# Altium PCB SM_ME0005V2.6_20161210.PcbDoc (part 1 of 3)
Units mil, origin at the board's own origin, x right, y up, seen from the top; angles counter-clockwise.
Board outline 2285 x 3470 mil, 2 copper layers (Top Layer, Bottom Layer); 87 components, 70 nets, 269 pads, 297 vias.
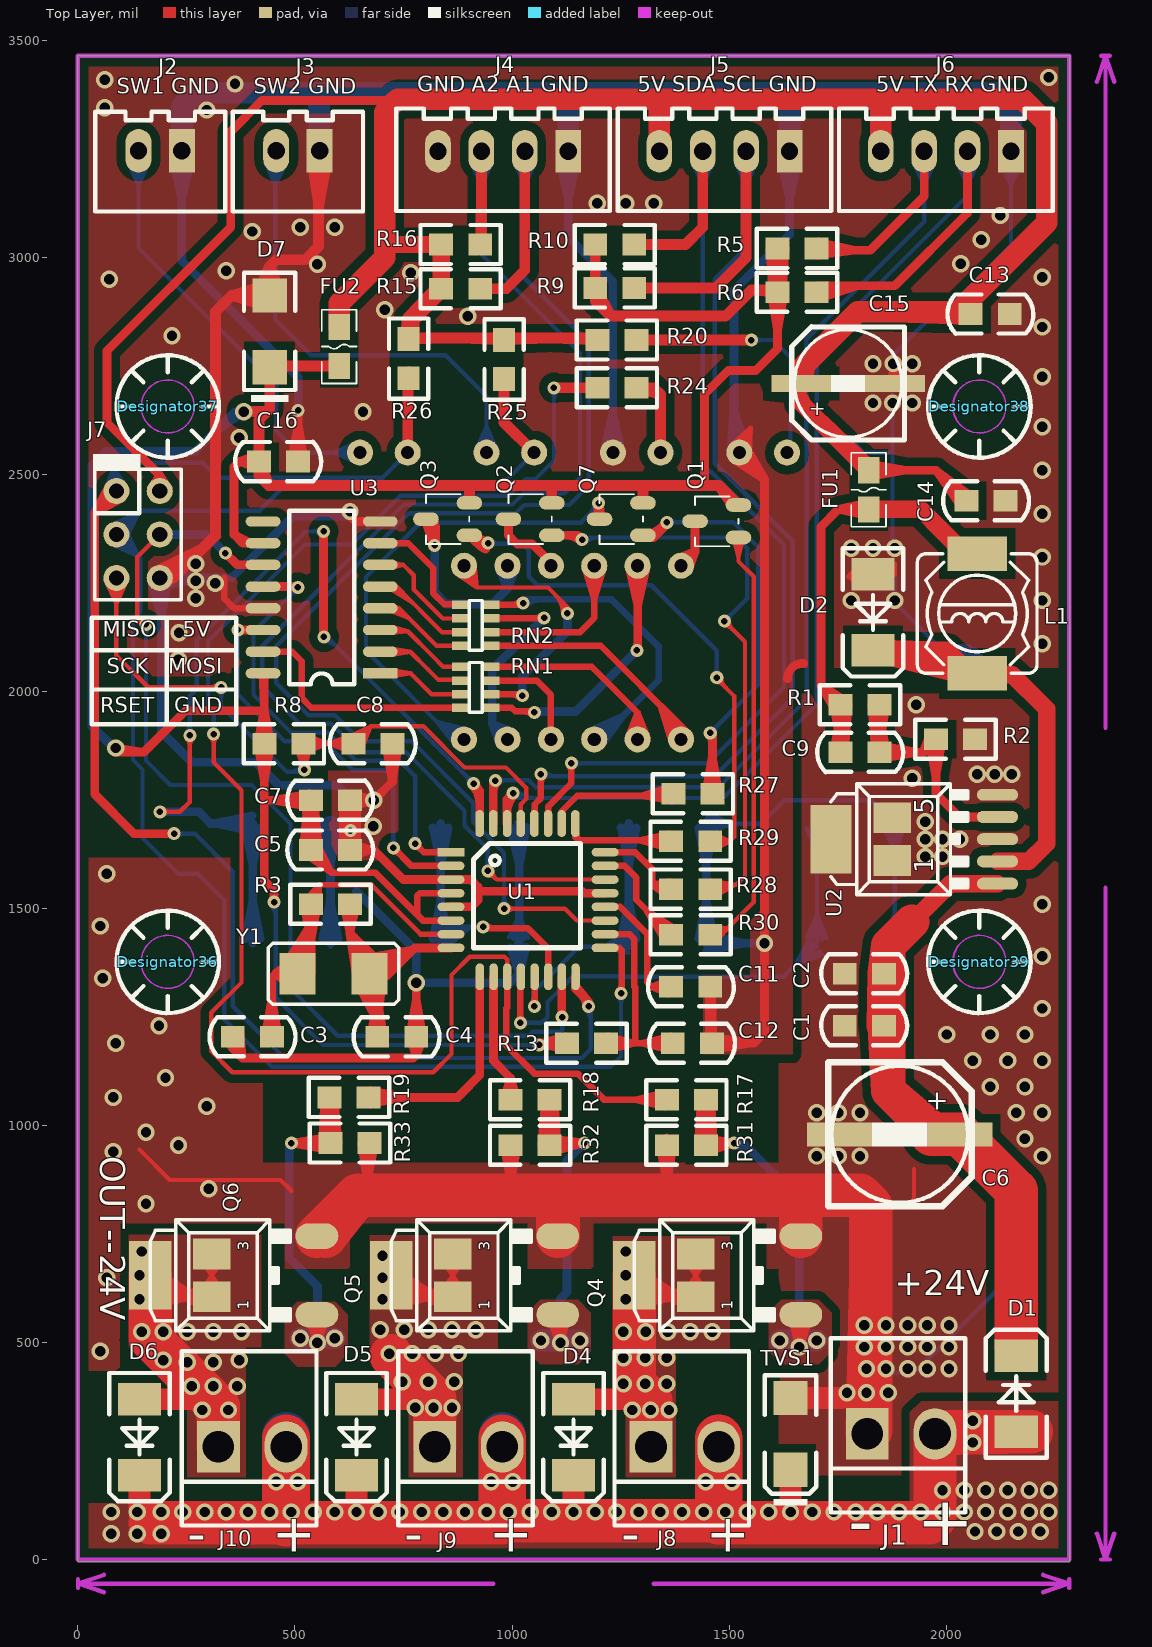
[diagram p0: Top Layer view]
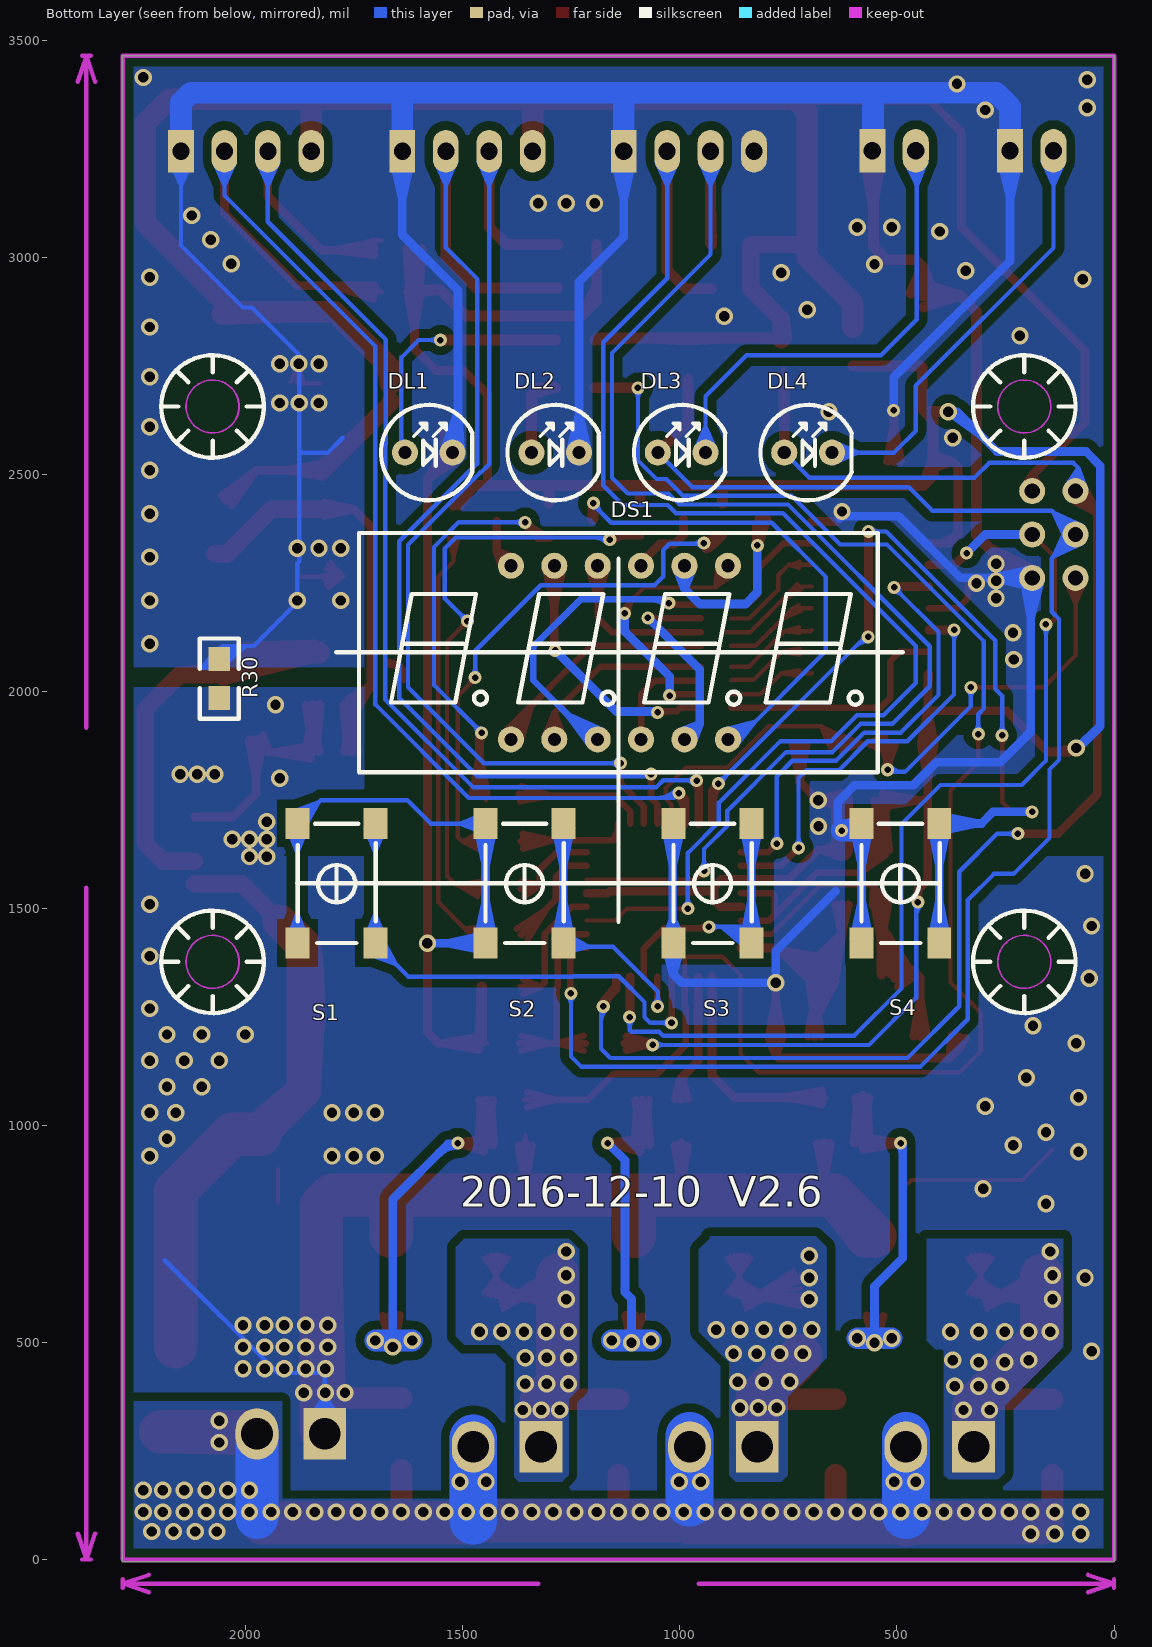
[diagram p1: Bottom Layer view, seen from below]
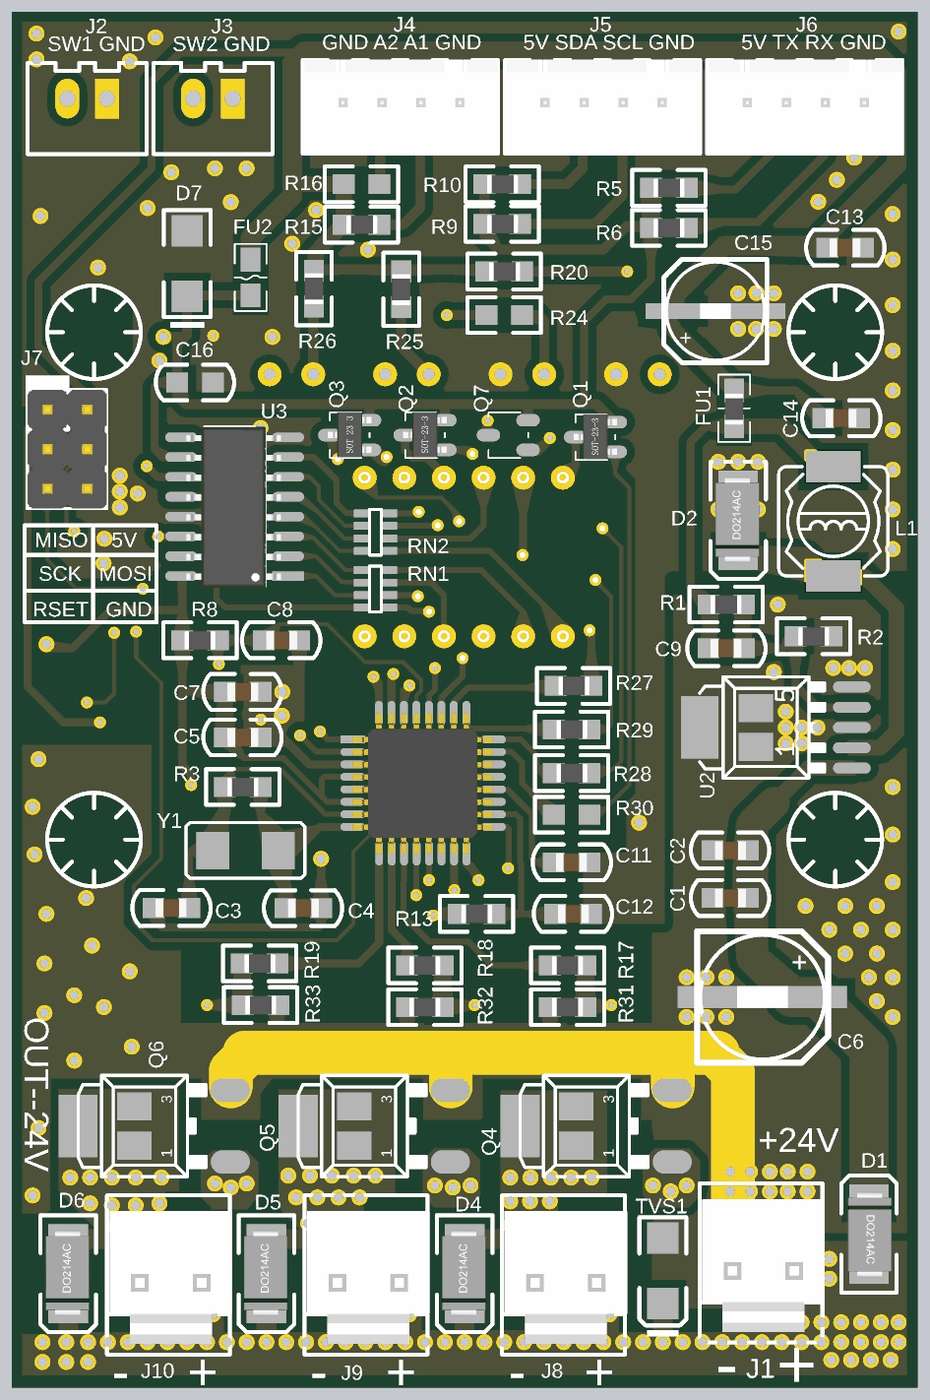
[diagram p4: 3D render of the assembled board from above, using the file's embedded part models]

## Layer stack, top to bottom
Top Layer: signal copper 1.4
Dielectric: core 12.6, FR-4, Dk 4.8
Bottom Layer: signal copper 1.4

## Board outline
-0.51,3464.57 -0.51,-5.43 2284.49,-5.43 2284.49,3464.57

## Design rules (kind name [scope] priority, off if disabled: settings)
AssemblyTestPointUsage [All] p1 off:
AssemblyTestpoint [All] p1 off: testpointundercomponent=TRUE minsize=40 maxsize=100 preferedsize=60 minholesize=0 maxholesize=40 preferedholesize=32 testpointgrid=1 usegrid=TRUE gridtolerance=0.01 allowsidetop=TRUE allowsidebottom=TRUE
Clearance [All] p1: gap=10
ComponentClearance [All] p1 off: gap=10 collisioncheckmode=3 verticalgap=10 showdistances=FALSE
FabricationTestPointUsage TestPointUsage [All] p1 off: valid=0 allowmultiple=FALSE
FabricationTestpoint Testpoint [All] p1 off: side=3 testpointundercomponent=TRUE minsize=40 maxsize=100 preferedsize=60 minholesize=0 maxholesize=40 preferedholesize=32 testpointgrid=1 allowsidetop=TRUE allowsidebottom=TRUE usegrid=TRUE gridtolerance=0.01
Height [All] p1 off: minheight=0 maxheight=1000 prefheight=500
HoleSize [All] p1 off: absolutevalues=TRUE maxlimit=100 minlimit=1 maxpercent=80.000 minpercent=20.000
HoleToHoleClearance [All] p1 off: gap=10 allowstackedmicrovias=TRUE
LayerPairs [All] p1 off: enforce=TRUE
MinimumSolderMaskSliver [All] p1 off: minsoldermaskwidth=10
NetAntennae [All] p1 off: netantennaetolerance=0
PolygonConnect [All] p1: connectstyle=Direct reliefconductorwidth=30 reliefentries=4 polygonreliefangle="45 Angle"
RoutingVias [All] p1: holewidth=15 width=30 viastyle="Through Hole" minholewidth=10 minwidth=20 maxholewidth=30 maxwidth=50
SilkToSilkClearance [All] p1 off: silktosilkclearance=10
SilkscreenOverComponentPads [IsPad] p1 off: minsilkscreentomaskgap=10
SolderMaskExpansion [isvia] p1: expansion=-100
Width [All] p1: maxlimit=300 minlimit=10 preferedwidth=20 minimp=50.000000 maximp=50.000000 favimp=50.000000
15 further rules are at their usual default settings.

## Components (designator, comment, footprint, x,y, rotation, side; value= is the part's Value field where it differs from the comment)
C1 "100pF" 0805C 1811.73,1229.57 r180 top
C2 "100pF" 0805C 1811.73,1349.57 r180 top
C3 "22pF" 0805C 401.73,1204.57 r0 top
C4 "22pF" 0805C 734.49,1204.08 r180 top
C5 "0.1uF" 0805C 581.73,1634.57 r180 top
C6 "100UF/63V_E" SMD-EC-F8 2031.73,979.57 r180 top
C7 "0.1uF" 0805C 581.73,1749.57 r180 top
C8 "100nF" 0805C 679.49,1879.57 r180 top
C9 "33nF" 0805C 1801.73,1859.57 r0 top
C11 "100nF" 0805C 1411.73,1319.57 r0 top
C12 "100nF" 0805C 1415.4,1189.57 r180 top
C13 "0.1UF" 0805C 2101.73,2869.57 r0 top
C14 "100pF" 0805C 2091.73,2439.57 r0 top
C15 "100uF/16V" SMD-EC-F6.3 1666.73,2709.57 r0 top
C16 "10uF" 0805c 461.73,2529.57 r180 top
D1 "1N4004" D7227 2161.73,294.57 r90 top
D2 "SS34" D7227 1831.73,2269.57 r270 top
D4 "1N4004" D7227 1141.73,369.57 r270 top
D5 "1N4004" D7227 641.73,369.57 r270 top
D6 "1N4004" D7227 141.73,369.57 r270 top
D7 "5.6V" LC-SMA(DO-214AC)_S4 441.73,2829.57 r90 top
Designator36 "Comment" M3.1 206.69,1376.97 r0 top locked
Designator37 "Comment" M3.1 206.69,2656.5 r0 top locked
Designator38 "Comment" M3.1 2076.77,2656.5 r0 top locked
Designator39 "Comment" M3.1 2076.77,1376.97 r0 top locked
DL1 "红" LED-3 1578.74,2550.2 r180 bottom
DL2 "绿" LED-3 1287.4,2550.2 r180 bottom
DL3 "黄" LED-3 996.06,2550.2 r180 bottom
DL4 "黄" LED-3 704.72,2550.2 r180 bottom
DS1 "SR410561K" SR410361 1139.49,2089.57 r180 bottom
FU1 "500mA/6V" F0805 1821.73,2419.57 r90 top
FU2 "100mA/6V" F0805 601.73,2839.57 r270 top
J1 "SIP2-2.54" CH3.96-2P 1974.49,289.57 r0 top
J2 "SIP2-2.54" SIP-2L 189.49,3245.57 r180 top
J3 "SIP2-2.54" SIP-2L 506.73,3245.57 r180 top
J4 "A_INPUT" SIP-4L 1129.49,3244.57 r180 top
J5 "IIC" SIP-4L 1639.49,3244.57 r180 top
J6 "USRT" SIP-4L 2149.49,3244.57 r180 top
J7 "ISP下载口" DIP6-2.54 239.49,2514.57 r270 top
J8 "OUT-A" CH3.96-2P 1476.15,259.57 r0 top
J9 "OUT-B" CH3.96-2P 977.82,259.57 r0 top
J10 "OUT-C" CH3.96-2P 479.49,259.57 r0 top
L1 "100uH/1A" L-CD74 2071.73,2179.57 r270 top
Q1 "S8550" SOT-23_B 1521.73,2354.57 r90 top
Q2 "S8550" SOT-23_B 1091.73,2359.57 r90 top
Q3 "S8550" SOT-23_B 901.73,2359.57 r90 top
Q4 "NCE4060K" TO-252-3S 1419.49,654.57 r90 top
Q5 "NCE4060K" TO-252-3S 859.49,654.57 r90 top
Q6 "NCE4060K" TO-252-3S 304.49,654.57 r90 top
Q7 "S8550" SOT-23_B 1301.73,2359.57 r90 top
R1 "10K" 0805R 1801.73,1969.57 r0 top
R2 "3.3K" 0805R 2021.73,1889.57 r180 top
R3 "1MR" 0805R 581.73,1509.57 r180 top
R5 "2K" 0805R 1656.73,3020.57 r180 top
R6 "2K" 0805R 1656.73,2919.57 r180 top
R8 "1K" 0805R 474.49,1879.57 r0 top
R9 "2K" 0805R 1236.73,2929.57 r180 top
R10 "2K" 0805R 1236.73,3029.57 r180 top
R13 "10R" 0805R 1171.73,1189.57 r180 top
R15 "10K" 0805R 881.73,2927.57 r180 top
R16 "10K" 0805R 881.73,3029.57 r180 top
R17 "22R" 0805R 1401.73,1059.57 r0 top
R18 "22R" 0805R 1041.73,1059.57 r0 top
R19 "22R" 0805R 624.49,1064.57 r180 top
R20 "2K" 0805R 1241.73,2809.57 r180 top
R24 "2K" 0805R 1241.73,2699.57 r180 top
R25 "2K" 0805R 981.73,2764.57 r90 top
R26 "2K" 0805R 761.73,2766.57 r90 top
R27 "1K" 0805R 1416.73,1764.57 r180 top
R28 "1K" 0805R 1411.73,1654.57 r180 top
R29 "1K" 0805R 1411.73,1544.57 r180 top
R30 "1K" 0805R 1411.73,1439.57 r180 top
R30 "0R" 0805R 2061.73,2029.57 r90 bottom
R31 "470K" 0805R 1401.73,954.57 r0 top
R32 "470k" 0805R 1041.73,954.57 r0 top
R33 "470k" 0805R 626.73,959.57 r180 top
RN1 "8P4R 0603" 8P4R_0603 881.73,2056.57 r0 top
RN2 "8P4R 0603" 8P4R_0603 881.73,2199.57 r0 top
S1 "SW-PB" BUTTON_SMT_6*6 1791.34,1558.07 r90 bottom
S2 "SW-PB" BUTTON_SMT_6*6 1358.27,1558.07 r90 bottom
S3 "SW-PB" BUTTON_SMT_6*6 925.2,1558.07 r90 bottom
S4 "SW-PB" BUTTON_SMT_6*6 492.13,1558.07 r90 bottom
TVS1 "SMBJ30CA" LC-SMA(DO-214AC)_S5 1641.73,289.57 r90 top
U1 "ATMEGA328PA" TQFP32 819.49,1729.57 r0 top
U2 "XL7015" TO-252-5L 1921.73,1659.57 r90 top
U3 "SN74HC595D" SO-16N 739.49,2014.57 r180 top
Y1 "16MHz" SMT5032 588.73,1349.57 r180 top

## Footprints (in the part's own frame and the unit in brackets; to place one, negate y for a bottom-side part, rotate by r counter-clockwise, add the part's x,y. Pads: shape width x height; smd on the part's side, far side on the other; paste and mask are expansions set on the pad)
8P4R_0603 [mm]
  rect 1.016x0.5 smd: 1(0,0) 2(1.778,0) 3(0,-0.8) 4(1.778,-0.8) 5(0,-1.6) 6(1.778,-1.6) 7(0,-2.4) 8(1.778,-2.4)
  silkscreen extent 0.51,-2.67 1.27,0.25
0805C [mil]
  rect 55x50 smd: 1(-45,0) 2(45,0)
  silkscreen extent -99,-45 99,45, body extent -40,-24 39,24, height 37
0805c [mil]
  rect 55x50 smd: 1(-45,0) 2(45,0)
  silkscreen extent -99,-45 99,45
0805R [mil]
  rect 55x50 smd: 1(-45,0) 2(45,0)
  silkscreen extent -92,-45 92,45, body extent -40,-24 39,24, height 20
BUTTON_SMT_6*6 [mm]
  rect 1.8x1.4 smd paste+0: 1(-3.5,2.275) 1(3.5,2.275) 2(-3.5,-2.275) 2(3.5,-2.275)
  silkscreen extent -3.5,-2.3 3.48,2.28
CH3.96-2P [mm]
  rect 2.5x3 hole 1.85: 1(-3.96,0)
  oval 2.5x3 hole 1.85: 2(0,0)
  silkscreen extent -6.1,-4.6 1.78,5.59, body extent -5.94,-3.91 1.92,4.59, height 10.9
D7227 [mil]
  rect 75x100 smd: A(0,0) K(175,0)
  silkscreen extent -60,-70 235,70, body extent -22,-57 194,53, height 88
DIP6-2.54 [mil]
  round 60 hole 35: 1(53,-151) 2(53,-51) 3(153,-151) 4(153,-51) 5(253,-151) 6(253,-51)
  silkscreen extent -33,-205 303,-1, body extent 3,-200 303,0, height 398
F0805 [mil]
  rect 60x50 smd: 1(0,0) 2(90,0)
  silkscreen extent -40,-40 130,40, body extent 4,-23 82,24, height 20
L-CD74 [mm]
  rect 2x3.5 smd mask+0.1: 1(3.5,0) 2(-3.5,0)
  silkscreen extent -3.5,-3.5 3.5,3.5
LC-SMA(DO-214AC)_S4 [mm]
  rect 2x2 smd: 1(2.1,0) 2(-2.1,0)
  silkscreen extent -4.12,-1.5 3.43,1.5
LC-SMA(DO-214AC)_S5 [mm]
  rect 2x2 smd: 1(2.1,0) 2(-2.1,0)
  silkscreen extent -4.2,-1.5 3.43,1.5
LED-3 [mil]
  round 60 hole 30: A(-55,0) K(55,0)
  silkscreen extent -110,-110 101,110
M3.1 [mil]
  Keep-Out Layer circle w3.94: c0,0 r61.02
  silkscreen extent -118,-118 118,118
SIP-2L [mil]
  rect 60x100 hole 40: 1(-50,0)
  oval 60x100 hole 40: 2(50,0)
  silkscreen extent -150,-90 150,140
SIP-4L [mm]
  rect 1.5x2.5 hole 1: 1(0,0)
  oval 1.5x2.5 hole 1: 2(2.54,0) 3(5.08,0) 4(7.62,0)
  silkscreen extent -2.44,-2.5 10.06,3.5, body extent -2.47,-2.52 9.93,3.58, height 7
SMD-EC-F6.3 [mm]
  rect 3.5x1 smd: 1(0,0) 2(5.475,0)
  silkscreen extent -0.56,-3.31 6.04,3.31
SMD-EC-F8 [mm]
  rect 3.8x1.4 smd: 1(0,0) 2(7.051,0)
  silkscreen extent -0.69,-4.22 7.71,4.2
SMT5032 [mm]
  rect 2.1x2.4 smd: 1(-2.1,0) 2(2.1,0)
  silkscreen extent -3.81,-1.78 3.81,1.78
SO-16N [mil]
  rect 80x24 smd: 1(43,-27)
  oval 80x24 smd: 2(43,-77) 3(43,-127) 4(43,-177) 5(43,-227) 6(43,-277) 7(43,-327) 8(43,-377) 9(313,-377) 10(313,-327) 11(313,-277) 12(313,-227) 13(313,-177) 14(313,-127) 15(313,-77) 16(313,-27)
  silkscreen extent 103,-402 253,-2, body extent 62,-403 300,3, height 84
SOT-23_B [mm]
  oval 0.8x1.5 smd: 1(0,0) 2(1.9,0) 3(0.95,2.54)
  silkscreen extent -0.51,0 2.4,2.54, body extent -0.48,-0.13 2.42,2.67, height 1.2
SR410361 [mil]
  round 60 hole 30: a(-150,200) b(250,200) c(50,-200) com1(-250,200) com2(50,200) com3(150,200) com4(250,-200) d(-150,-200) dp(-50,-200) e(-250,-200) f(-50,200) g(150,-200)
  silkscreen extent -600,-276 595,276, body extent -591,-275 591,276, height 287
TO-252-3S [mm]
  oval 1.5x2.5 smd: 1(-2.3,-6.25) 3(2.3,-6.25)
  rect 1.8x2.2 smd: 2(-1.25,-0.1) 2(1.25,-0.1)
  rect 4x2.5 smd: 2(0,3.5)
  silkscreen extent -3.25,-4.7 3.25,3.5
TO-252-5L [mm]
  oval 0.7x2.413 smd: 1(-2.6,-5) 2(-1.3,-5) 3(0,-5) 4(1.3,-5) 5(2.6,-5)
  rect 1.8x2.2 smd: 3(-1.25,1.15) 3(1.25,1.15)
  rect 4x2.413 smd: 3(0,4.75)
  silkscreen extent -3.25,-3.25 3.25,4.75
TQFP32 [mil]
  rect 62x19.68 smd: 1(40,-100)
  oval 62x19.68 smd: 2(40,-131.5) 3(40,-162.99) 4(40,-194.49) 5(40,-225.98) 6(40,-257.48) 7(40,-288.98) 8(40,-320.47) 17(395,-320.47) 18(395,-288.98) 19(395,-257.48) 20(395,-225.98) 21(395,-194.49) 22(395,-162.99) 23(395,-131.5) 24(395,-100)
  oval 19.68x62 smd: 9(106.51,-387) 10(138.01,-387) 11(169.5,-387) 12(201,-387) 13(232.5,-387) 14(263.99,-387) 15(295.49,-387) 16(326.98,-387) 25(326.52,-33.95) 26(295.02,-33.95) 27(263.53,-33.95) 28(232.03,-33.95) 29(200.54,-33.95) 30(169.04,-33.95) 31(137.54,-33.95) 32(106.05,-33.95)
  silkscreen extent 92,-320 338,-80, body extent 39,-388 393,-34, height 63

## Part data
C3 C4 C5 C7 C8 C11 C12 C16: library part CAP, "Capa"
C6 C15: library part 22UF/35V_E
D1 D4 D5 D6: library part Diode_2, "Default Diode"
D2: library part DIODE, "DIODE"
D7 TVS1: library part DIODE2, "DIODE2"
FU1 FU2: library part FUSE2, "Fuse"
J1 J2 J3: "CN"
J4 J5 J6: library part SIP4-2.54, "CN"
J8 J9 J10: library part CON2, "Connector"
L1: library part INDUCTOR
Q1 Q2 Q3 Q7: library part PNP, "PNP Transistor"
Q4 Q5 Q6: "NMOSFET"
R3 R5 R6 R8 R9 R10 R13: library part Res3, "Res"
U3: "8-Bit Shift Register with"
Y1: library part XTAL, "Crystal Oscil"

## Via types
v1: diameter 40, hole 24, Top Layer to Bottom Layer, 247 vias
v2: diameter 30, hole 15, Top Layer to Bottom Layer, 50 vias

## Nets (pads, with @x,y where several pads share a name; then routed paths per layer and width w, separated by ;. In a path a pad name is that pad's centre, name@x,y a point inside that pad or via, vN(x,y) a via of type N, cw(c..) or ccw(c..) an arc to the next point about the centre after c; other vN are vias at no path point)
+5V: C13.1 C14.1 C15.1 FU1.2 FU2.1 J5.4 J6.4 J7.2 R15.2 R16.2 R20.2 R25.2 R26.2 | length 8762.6
  Top Layer w10: R26.2@761.73,2814.57 R26.2@766.73,2809.57 ; 1339.49,3356.81 1817.24,3356.81 1849.49,3324.57
  Top Layer w20: 733.73,3361.57 423.73,3361.57 351.73,3289.57 351.73,3069.57 66.73,2784.57 66.73,2619.57 188.49,2497.81 ; 1666.73,2729.57 C15.1@1666.73,2709.57 ; 1696.73,2639.57 1666.73,2669.57 ; FU1.2@1821.73,2509.57 1976.73,2509.57 C14.1@2046.73,2439.57 ; FU1.2@1823.06,2494.62 1906.73,2509.57 FU1.2@1823.06,2524.51 ; C14.1@2032.63,2430.06 1979.31,2506.99 ; C14.1@2044.23,2439.57 1979.31,2506.99 ; C14.1@2054.17,2450.8 1979.31,2506.99 ; 188.49,2497.81 J7.2@188.49,2461.57 188.49,2497.81 ; 188.49,2497.81 207.71,2467.08 188.49,2497.81 ; 188.49,2497.81 169.26,2467.08 188.49,2497.81 ; 1666.73,2669.57 C15.1@1666.73,2709.57 ; 1666.73,2669.57 C15.1@1666.73,2709.57
  Top Layer w25: R26.2@761.73,2811.57 861.93,2814.57 ; R26.2@761.73,2814.57 766.73,2814.57 1191.73,2814.57 R20.2@1196.73,2809.57 ; 881.34,2814.57 R25.2@981.73,2809.57 1082.12,2814.57 ; 1093.75,2814.57 R20.2@1194.23,2809.57
  Top Layer w40: R26.2@766.73,2809.57 766.73,2814.57 766.73,2857.57 ; R15.2@834.23,2927.57 766.73,2857.57 ; R16.2@834.23,3029.57 706.73,3029.57 R16.2@836.73,3029.57 ; 1666.73,2669.57 1666.73,2664.57 FU1.2@1821.73,2509.57 ; 1711.88,2619.42 FU1.2@1821.73,2514.57 ; 766.73,2857.57 761.73,2814.07 766.73,2857.57 ; 766.73,2857.57 R15.2@836.73,2927.57 ; R15.2@836.73,2927.57 R16.2@836.73,3029.57 ; R15.2@836.73,2927.57 R16.2@836.73,3029.57
  Top Layer w50: FU2.1@601.73,2839.57 601.73,2894.57 ; J5.4@1339.49,3244.57 1339.49,3349.57 J5.4@1339.49,3264.25 ; C15.1@1666.73,2709.57 1674.23,2752.07 1796.73,2874.57 2026.73,2874.57 ; 1666.73,2729.57 1666.73,2744.57 ; J6.4@1849.49,3244.57 1849.49,3324.57 ; J6.4@1849.49,3264.25 1849.49,3324.57 ; 1878.87,2874.57 C13.1@2054.23,2869.57 ; 601.73,2894.57 601.73,2844.57 601.73,2894.57 ; 601.73,2894.57 706.73,2999.57 706.73,3029.57 706.73,3334.57 733.73,3361.57 736.73,3364.57 862.49,3364.57 1861.73,3364.57 ; 1849.49,3324.57 1849.49,3352.32 1861.73,3364.57 ; 1861.73,3364.57 2176.73,3364.57 2231.73,3309.57 2231.73,3079.57 2026.73,2874.57 ; 2026.73,2874.57 C13.1@2054.23,2869.57 ; 2026.73,2874.57 C13.1@2054.23,2869.57
+24V: D1.A D4.K D5.K D6.K J1.2 J8.2 J9.2 J10.2 TVS1.2 | length 13717.8
  Top Layer w10: D4.K@1129.49,194.57 D4.K@1141.73,194.57 D4.K@1146.73,189.57 ; D1.A@2139.49,289.57 2148.11,280.94 2161.73,267.32 D1.A@2139.49,289.57
  Top Layer w20: 1141.73,89.57 v1(1141.73,109.57)
  Top Layer w25: 479.49,67.32 479.49,84.57 ; D4.K@1141.73,194.57 D4.K@1146.73,189.57 ; 1471.15,89.57 1476.15,84.57 1476.15,70.14
  Top Layer w50: D6.K@141.73,194.57 v1@141.73,109.57 ; v1(641.73,109.57) D5.K@641.73,194.57 ; v1(1141.73,109.57) D4.K@1141.73,194.57 ; v1@141.73,109.57 166.73,84.57 v1@141.73,109.57 ; v1@1641.73,99.57 TVS1.2@1641.73,206.89 v1@1641.73,99.57 ; v1@1641.73,99.57 1651.73,89.57 ; 1651.73,89.57 1646.73,84.57 1651.73,89.57
  Top Layer w100: 741.73,84.57 479.49,84.57 ; v1@977.82,99.57 987.82,89.57 ; 479.49,84.57 461.73,84.57 391.73,84.57 326.73,84.57 266.73,84.57 206.73,84.57 166.73,84.57 479.49,84.57 ; 479.49,84.57 526.73,84.57 596.73,84.57 661.73,84.57 726.73,84.57 791.73,84.57 851.73,84.57 906.73,84.57 ; 479.49,84.57 906.73,84.57 ; 906.73,84.57 961.73,84.57 977.82,84.57 906.73,84.57 ; 987.82,89.57 1021.73,89.57 1081.73,89.57 1141.73,89.57 1151.73,89.57 1211.73,89.57 1271.73,89.57 1326.73,89.57 1386.73,89.57 1441.73,89.57 1471.15,89.57 987.82,89.57 ; 1646.73,84.57 1611.73,84.57 1556.73,84.57 1496.73,84.57 1476.15,84.57 1646.73,84.57 ; 1646.73,84.57 1671.73,84.57 1736.73,84.57 1791.73,84.57 1851.73,84.57 1906.73,84.57 1941.73,84.57 1961.73,84.57 ; 1646.73,84.57 1961.73,84.57 ; 1961.73,84.57 1974.49,97.32 ; 1974.49,97.32 J1.2@1974.49,279.72 ; 1974.49,97.32 1974.49,134.57 1974.49,139.57 ; 1974.49,97.32 J1.2@1974.49,289.57 ; 1974.49,139.57 J1.2@1974.49,279.72 ; 1974.49,139.57 1974.49,199.57 ; 1974.49,199.57 J1.2@1974.49,279.72 ; 1974.49,199.57 J1.2@1974.49,279.72 ; 1974.49,199.57 1974.49,219.57 ; 1974.49,219.57 J1.2@1974.49,279.72 ; 1974.49,219.57 J1.2@1974.49,279.72 ; 1974.49,219.57 J1.2@1974.49,289.57 ; J1.2@1974.49,289.57 2061.73,294.57 ; J1.2@1974.49,289.57 D1.A@2149.23,294.57 ; J1.2@1974.49,289.57 D1.A@2149.23,294.57 ; J1.2@1974.49,289.57 2056.73,294.57 ; J1.2@1974.49,289.57 D1.A@2149.23,294.57 ; J1.2@1974.49,289.57 2061.73,294.57 ; J1.2@1974.49,289.57 D1.A@2149.23,294.57 ; J1.2@1974.49,289.57 2061.73,294.57 ; J1.2@1974.49,289.57 D1.A@2161.73,294.57 2061.73,294.57 ; J1.2@1974.49,289.57 2196.73,294.57 J1.2@1979.49,294.57 ; J1.2@1974.49,289.57 2056.73,294.57 ; J1.2@1974.49,289.57 2056.73,294.57 ; J1.2@1974.49,289.57 2061.73,294.57 ; J1.2@1974.49,289.57 J1.2@1979.49,294.57 ; J1.2@1979.49,294.57 D1.A@2149.23,294.57 ; J1.2@1979.49,294.57 2056.73,294.57 ; 2056.73,294.57 D1.A@2149.23,294.57 ; 2056.73,294.57 2061.73,294.57 ; 2061.73,294.57 D1.A@2149.23,294.57 ; 2061.73,294.57 D1.A@2149.23,294.57
  Top Layer w110: J10.2@479.49,259.57 479.49,179.57 ; J10.2@479.49,279.57 479.49,84.57 ; J9.2@977.82,279.57 J9.2@977.82,259.57 ; J8.2@1476.15,259.57 1476.15,179.57 ; J8.2@1476.15,279.57 v1@1476.15,109.57 ; 479.49,84.57 J10.2@479.49,249.72 ; 479.49,84.57 J10.2@479.49,249.72 ; 479.49,84.57 479.49,179.57 ; 479.49,179.57 J10.2@479.49,249.72 ; 479.49,179.57 J10.2@479.49,249.72 ; v1@977.82,99.57 J9.2@977.82,249.72 ; v1@977.82,99.57 J9.2@977.82,249.72 ; v1@977.82,99.57 977.82,179.57 ; v1@977.82,99.57 J9.2@977.82,259.57 ; 977.82,179.57 J9.2@977.82,249.72 ; 977.82,179.57 J9.2@977.82,249.72 ; 977.82,179.57 J9.2@977.82,259.57 ; v1@1476.15,109.57 J8.2@1476.15,249.72 ; v1@1476.15,109.57 J8.2@1476.15,249.72 ; v1@1476.15,109.57 1476.15,179.57 ; 1476.15,179.57 J8.2@1476.15,249.72 ; 1476.15,179.57 J8.2@1476.15,249.72
  Bottom Layer w100: 1974.49,96.81 J1.2@1974.49,279.72 ; 1974.49,96.81 1974.49,134.57 1974.49,139.57 ; 1974.49,96.81 J1.2@1974.49,289.57 1974.49,219.57 ; 1974.49,139.57 J1.2@1974.49,279.72 ; 1974.49,139.57 1974.49,199.57 ; 1974.49,199.57 J1.2@1974.49,279.72 ; 1974.49,199.57 J1.2@1974.49,279.72 ; 1974.49,199.57 1974.49,219.57 ; 1974.49,219.57 J1.2@1974.49,279.72 ; 1974.49,219.57 J1.2@1974.49,279.72
  Bottom Layer w110: J10.2@479.49,259.57 479.49,179.57 ; J10.2@479.49,284.57 v1@479.49,101.81 ; J9.2@977.82,259.57 977.82,179.57 ; J9.2@977.82,284.57 977.82,130.66 ; J8.2@1476.15,259.57 1476.15,179.57 ; J8.2@1476.15,279.57 1476.15,89.57 ; v1@479.49,101.81 J10.2@479.49,249.72 ; v1@479.49,101.81 J10.2@479.49,249.72 ; v1@479.49,101.81 479.49,179.57 ; 479.49,179.57 J10.2@479.49,249.72 ; 479.49,179.57 J10.2@479.49,249.72 ; 977.82,130.66 J9.2@977.82,249.72 ; 977.82,130.66 J9.2@977.82,249.72 ; 977.82,130.66 977.82,179.57 ; 977.82,179.57 J9.2@977.82,249.72 ; 977.82,179.57 J9.2@977.82,249.72 ; 1476.15,89.57 J8.2@1476.15,249.72 ; 1476.15,89.57 J8.2@1476.15,249.72 ; 1476.15,89.57 1476.15,179.57 ; 1476.15,179.57 J8.2@1476.15,249.72 ; 1476.15,179.57 J8.2@1476.15,249.72
  other v1: 76.73,59.57 136.73,59.57 191.73,59.57 2066.73,64.57 2116.73,64.57 2166.73,64.57 2216.73,64.57 76.73,109.57 136.73,109.57 191.73,109.57 241.73,109.57 291.73,109.57 341.73,109.57 391.73,109.57 441.73,109.57 491.73,109.57 541.73,109.57 591.73,109.57 691.73,109.57 741.73,109.57 791.73,109.57 841.73,109.57 891.73,109.57 941.73,109.57 991.73,109.57 1041.73,109.57 1091.73,109.57 1191.73,109.57 1241.73,109.57 1291.73,109.57 1341.73,109.57 1391.73,109.57 1441.73,109.57 1491.73,109.57 1541.73,109.57 1591.73,109.57 1641.73,109.57 1691.73,109.57 1741.73,109.57 1791.73,109.57 1841.73,109.57 1891.73,109.57 1941.73,109.57 1991.73,109.57 2041.73,109.57 2091.73,109.57 2141.73,109.57 2191.73,109.57 2236.73,109.57 1991.73,159.57 2041.73,159.57 2091.73,159.57 2141.73,159.57 2191.73,159.57 2236.73,159.57 456.73,179.57 506.73,179.57 951.73,179.57 1001.73,179.57 1446.73,179.57 1506.73,179.57 2061.73,269.57 2061.73,319.57
A1: J4.2 R15.1 U1.19 | length 3748.4
  Top Layer w10: v2(981.73,1499.57) 1121.73,1499.57 1149.21,1472.09 U1.19@1214.49,1472.09 ; v2@988.8,1492.49 cw(c1005.87,1475.42) 1005.87,1499.57 cw(c1005.87,1523.71) v2@988.8,1506.64 ; 1153.49,1472.09 U1.19@1193.33,1472.09
  Top Layer w25: R15.1@926.73,2927.57 986.73,2927.57 ; R15.1@929.23,2927.57 986.73,2927.57 ; J4.2@1029.49,3244.57 1029.49,2970.32 986.73,2927.57
  Bottom Layer w10: v2@974.66,1506.64 ccw(c957.59,1523.71) 981.73,1523.71 ccw(c1005.87,1523.71) v2@988.8,1506.64 ; v2(981.73,1499.57) 981.73,1619.57 ; 981.73,1627.57 981.73,1619.57 ; J4.2@1005.49,3219.83 1029.49,3165.35 ; J4.2@1015.07,3223.11 1029.49,3165.35 ; J4.2@1029.49,3224.88 1029.49,3165.35 ; J4.2@1029.49,3244.57 1029.49,2951.81 1176.73,2804.57 1176.73,2474.57 1131.73,2429.57 1028.3,2429.57 1009.52,2410.78 762.95,2410.78 701.73,2349.57 456.73,2104.57 456.73,2019.57 531.15,1945.15 592.02,1945.15 651.61,1885.57 768.31,1885.57 910.73,1743.14 910.73,1699.04 981.73,1628.04 981.73,1619.57 ; J4.2@1043.91,3223.11 1029.49,3165.35 ; J4.2@1053.49,3219.83 1029.49,3165.35
A2: J4.3 R16.1 U1.22 | length 3585.4
  Top Layer w10: v2@944.49,1576.57 cw(c944.49,1552.42) 961.56,1569.49 cw(c978.63,1586.57) v2@954.49,1586.57 ; v2(944.49,1586.57) 964.48,1566.57 U1.22@1214.49,1566.57 ; 1153.49,1566.57 U1.22@1193.33,1566.57
  Top Layer w25: 929.49,3129.7 R16.1@926.73,3029.57 929.49,3032.32 J4.3@929.49,3244.57
  Bottom Layer w10: J4.3@905.49,3219.83 929.49,3165.35 ; J4.3@915.07,3223.11 929.49,3165.35 ; J4.3@929.49,3224.88 929.49,3165.35 ; J4.3@929.49,3244.57 929.49,3006.81 1156.73,2779.57 1156.73,2492.22 1120.4,2455.9 1026.35,2455.9 1001.23,2430.78 751.23,2430.78 424.49,2104.04 424.49,2011.81 511.15,1925.15 583.74,1925.15 648.67,1860.22 755.48,1860.22 890.73,1724.97 890.73,1690.57 944.49,1636.81 v2(944.49,1586.57) ; v2@937.42,1593.64 ccw(c920.35,1610.71) 944.49,1610.71 ccw(c968.63,1610.71) v2@951.56,1593.64 ; J4.3@943.91,3223.11 929.49,3165.35 ; J4.3@953.49,3219.83 929.49,3165.35
CTR_OUT1: R17.1 R24.2 U1.11 | length 4276.5
  Top Layer w10: v2@305.66,1894.49 cw(c288.59,1877.42) 312.73,1877.42 cw(c336.87,1877.42) v2@319.8,1894.49 ; v2(312.73,1901.57) 312.73,1836.57 376.73,1772.57 376.73,1329.57 311.73,1264.57 306.73,1259.57 306.73,1171.32 355.49,1122.57 818.49,1122.57 860.49,1164.57 860.49,1346.57 902.49,1388.57 982.73,1388.57 988.99,1382.31 ; U1.11@988.99,1342.57 988.99,1382.31 ; U1.11@988.99,1363.72 988.99,1382.31
  Top Layer w15: U1.11@986.99,1340.56 U1.11@988.99,1342.57 988.99,1271.57 ; U1.11@988.99,1321.41 988.99,1271.57 ; R17.1@1352.04,1042.2 1284.23,1059.57 ; R17.1@1352.04,1076.93 1284.23,1059.57 ; R17.1@1354.23,1059.57 1284.23,1059.57 ; R17.1@1356.73,1059.57 1211.73,1059.57 1151.73,1119.57 1051.73,1119.57 986.99,1184.31 986.99,1269.57 988.99,1271.57
  Top Layer w25: R24.2@1194.23,2699.57 v2(1096.73,2699.57) R24.2@1196.73,2699.57
  Bottom Layer w10: v2@305.66,1908.64 ccw(c288.59,1925.71) 312.73,1925.71 ccw(c336.87,1925.71) v2@319.8,1908.64 ; v2(312.73,1901.57) 312.73,1947.57 299.73,1960.57 299.73,2115.24 523.06,2338.57 630.73,2338.57 742.95,2450.78 992.95,2450.78 1031.73,2489.57 1054.07,2489.57 1096.73,2532.22 v2(1096.73,2699.57) ; v2@1089.66,2692.49 cw(c1072.59,2675.42) 1096.73,2675.42 cw(c1120.87,2675.42) v2@1103.8,2692.49
CTR_OUT2: R18.1 U1.10 | length 469.1
  Top Layer w20: 957.5,1251.57 U1.10@957.5,1321.41 ; U1.10@957.5,1342.57 957.5,1148.8 996.73,1109.57 ; R18.1@981.9,1061.82 996.73,1109.57 ; R18.1@996.73,1059.57 996.73,1109.57 ; R18.1@1011.56,1061.82 996.73,1109.57
CTR_OUT3: R19.1 U1.9 | length 834.2
  Top Layer w10: 874.49,1069.57 879.49,1069.57
  Top Layer w20: R19.1@669.49,1064.57 874.49,1064.57 879.49,1069.57 926,1116.08 U1.9@926,1342.57 ; R19.1@671.99,1064.57 756.99,1064.57 ; R19.1@673.31,1049.62 756.99,1064.57 ; R19.1@673.31,1079.51 756.99,1064.57 ; 926,1251.57 U1.9@926,1321.41
DIS_COM1: Q1.1 R30.1@1456.73,1439.57 | length 1590.5
  Top Layer w10: Q1.1@1511.06,2353.3 1521.73,2308.82 ; Q1.1@1532.41,2353.3 1521.73,2308.82 ; 1496.73,1454.57 1459.23,1439.57 1496.73,1454.57 ; 1496.73,1454.57 1464.07,1430.81 1496.73,1454.57 ; 1496.73,1454.57 1456.7,1449.24 1496.73,1454.57 ; 1496.73,1454.57 1471.03,1423.41 1496.73,1454.57 ; 1496.73,1454.57 1456.63,1459.4 1496.73,1454.57 ; 1496.73,1454.57 1556.73,1514.57 1556.73,2264.57 1521.73,2299.57 Q1.1@1521.73,2354.57 1521.73,2308.82 ; 1496.73,1454.57 1456.73,1454.57 1441.73,1454.57 1496.73,1454.57
DIS_COM2: Q2.1 R29.1 | length 2231.4
  Top Layer w10: R29.1@1466.21,1525.82 1514.76,1554.57 ; R29.1@1466.23,1525.83 1514.58,1554.57 ; v2@1489.49,2151.81 cw(c1489.49,2127.67) 1506.56,2144.74 cw(c1523.63,2161.81) v2@1499.49,2161.81 ; v2(1489.49,2161.81) 1536.73,2114.57 1536.73,1574.57 1516.73,1554.57 ; 1514.58,1554.57 1459.23,1544.57 1514.76,1554.57 ; 1514.58,1554.57 1461.88,1534.92 1514.76,1554.57 ; 1514.58,1554.57 1458.34,1554.53 1514.76,1554.57 ; 1514.58,1554.57 1459.23,1564.57 1514.76,1554.57 ; 1516.73,1554.57 1456.73,1554.57 1441.73,1554.57 1516.73,1554.57
  Top Layer w20: Q2.1@1091.73,2359.57 v2@1151.73,2359.57 ; Q2.1@1105.51,2359.57 v2@1151.73,2359.57 ; v2(1161.73,2349.57) v2@1151.73,2359.57 ; 1125.52,2359.57 cw(c1125.52,2313.35) 1158.2,2346.03 ccw(c1125.52,2313.35) 1125.52,2359.57
  Bottom Layer w10: v2(1161.73,2349.57) 1166.73,2354.57 1516.73,2354.57 1541.73,2329.57 1541.73,2214.05 v2(1489.49,2161.81) ; v2@1168.8,2342.49 cw(c1197.95,2313.35) 1197.95,2354.57 ; v2@1489.49,2171.81 ccw(c1489.49,2195.95) 1506.56,2178.88 ccw(c1523.63,2161.81) v2@1499.49,2161.81
DIS_COM3: Q3.1 R28.1 | length 1835.6
  Top Layer w10: v2@934.73,2341.57 v2(944.73,2341.57) ; R28.1@1441.73,1654.57 R28.1@1456.73,1654.57 1501.73,1654.57 ; R28.1@1459.23,1654.57 1501.73,1654.57 ; R28.1@1460.41,1644.64 1501.73,1654.57 ; R28.1@1460.41,1664.5 1501.73,1654.57 ; R28.1@1463.94,1635.13 1501.73,1654.57 ; R28.1@1463.94,1674 1501.73,1654.57 ; v2@1470.73,2030.57 v2(1471.73,2031.57) ; v2@1471.73,2021.57 cw(c1471.73,2002.25) 1485.39,2015.91 ; v2@1476.73,2024.57 1511.73,1989.57 1511.73,1664.57 1501.73,1654.57 ; v2@1481.73,2031.57 ccw(c1510.7,2031.57) 1490.22,2011.08
  Top Layer w20: Q3.1@919.2,2356.11 ccw(c943.41,2381.95) v2@944.57,2346.56 ; v2@943.82,2346.48 cw(c935.22,2393.05) Q3.1@901.73,2359.57 919.73,2341.57 ; Q3.1@915.51,2359.57 919.73,2341.57 ; Q3.1@915.51,2359.57 919.73,2341.57 ; Q3.1@915.51,2359.57 934.73,2341.57 919.73,2341.57 ; Q3.1@915.89,2357.96 ccw(c961.54,2368.67) 936.83,2328.82 cw(c961.54,2368.67) Q3.1@915.89,2357.96 ; Q3.1@917.06,2352.98 ccw(c952.04,2361.18) 939.49,2327.51 cw(c952.04,2361.18) Q3.1@917.06,2352.98
  Bottom Layer w10: v2(944.73,2341.57) 945.73,2340.57 1023.73,2340.57 1038.73,2325.57 1038.73,2264.57 1058.73,2244.57 1320.73,2244.57 1471.73,2093.57 v2(1471.73,2031.57) ; v2@951.8,2334.49 cw(c966.46,2319.84) 966.46,2340.57 ; v2@951.8,2348.64 ccw(c971.29,2368.12) 971.29,2340.57 ; v2@1464.66,2038.64 ccw(c1447.59,2055.71) 1471.73,2055.71 ccw(c1495.87,2055.71) v2@1478.8,2038.64
DIS_COM4: Q7.1 R27.1 | length 1332
  Top Layer w10: R27.1@1446.73,1749.57 R27.1@1461.73,1764.57 R27.1@1466.73,1769.57
  Top Layer w20: Q7.1@1315.51,2359.57 v2@1356.73,2384.57 ; 1339.8,2374.3 ccw(c1325.97,2397.1) v2@1351.88,2390.76 ; 1344.66,2372.49 ccw(c1327.59,2389.57) v2@1351.73,2389.57 ; v2(1356.73,2389.57) v2@1356.73,2384.57 ; R27.1@1446.79,1765.89 1461.73,1849.57 R27.1@1476.67,1765.89 ; v2@1453.2,1901.03 cw(c1432.59,1880.42) 1461.73,1880.42 ; v2(1456.73,1904.57) 1461.73,1899.57 R27.1@1461.73,1764.57 ; Q7.1@1326.73,2354.57 v2@1356.73,2384.57 ; Q7.1@1326.73,2354.57 1301.73,2354.57 Q7.1@1326.73,2354.57
  Bottom Layer w10: v2(1356.73,2389.57) 1510.02,2389.57 1566.73,2332.85 1566.73,2014.57 v2(1456.73,1904.57) ; v2@1363.8,2382.49 cw(c1380.87,2365.42) 1380.87,2389.57 cw(c1380.87,2413.71) v2@1363.8,2396.64 ; v2@1456.73,1914.57 ccw(c1456.73,1938.71) 1473.8,1921.64 ccw(c1490.87,1904.57) v2@1466.73,1904.57
DS: U1.2 U3.14 | length 1149.7
  Top Layer w10: v2(726.73,1639.57) v2@731.73,1639.57
  Top Layer w15: v2@726.73,1632.07 cw(c726.73,1613.96) 739.54,1626.76 cw(c752.34,1639.57) v2@734.23,1639.57 ; v2(726.73,1639.57) 768.23,1598.07 U1.2@859.49,1598.07 ; 783.49,1598.07 U1.2@838.33,1598.07
  Top Layer w20: U3.14@398.49,2141.57 v2(368.49,2141.57) U3.14@426.49,2141.57
  Bottom Layer w10: v2@361.42,2134.49 cw(c344.35,2117.42) 368.49,2117.42 cw(c392.63,2117.42) v2@375.56,2134.49 ; v2(368.49,2141.57) 368.49,1992.81 476.15,1885.15 567.17,1885.15 633.74,1818.58 708.72,1818.58 726.73,1800.57 v2(726.73,1639.57) ; v2@719.66,1646.64 ccw(c702.59,1663.71) 726.73,1663.71 ccw(c750.87,1663.71) v2@733.8,1646.64